# EAGLE board Yitran_IT900_Hutschiene_1_4 (EAGLE 6.1)
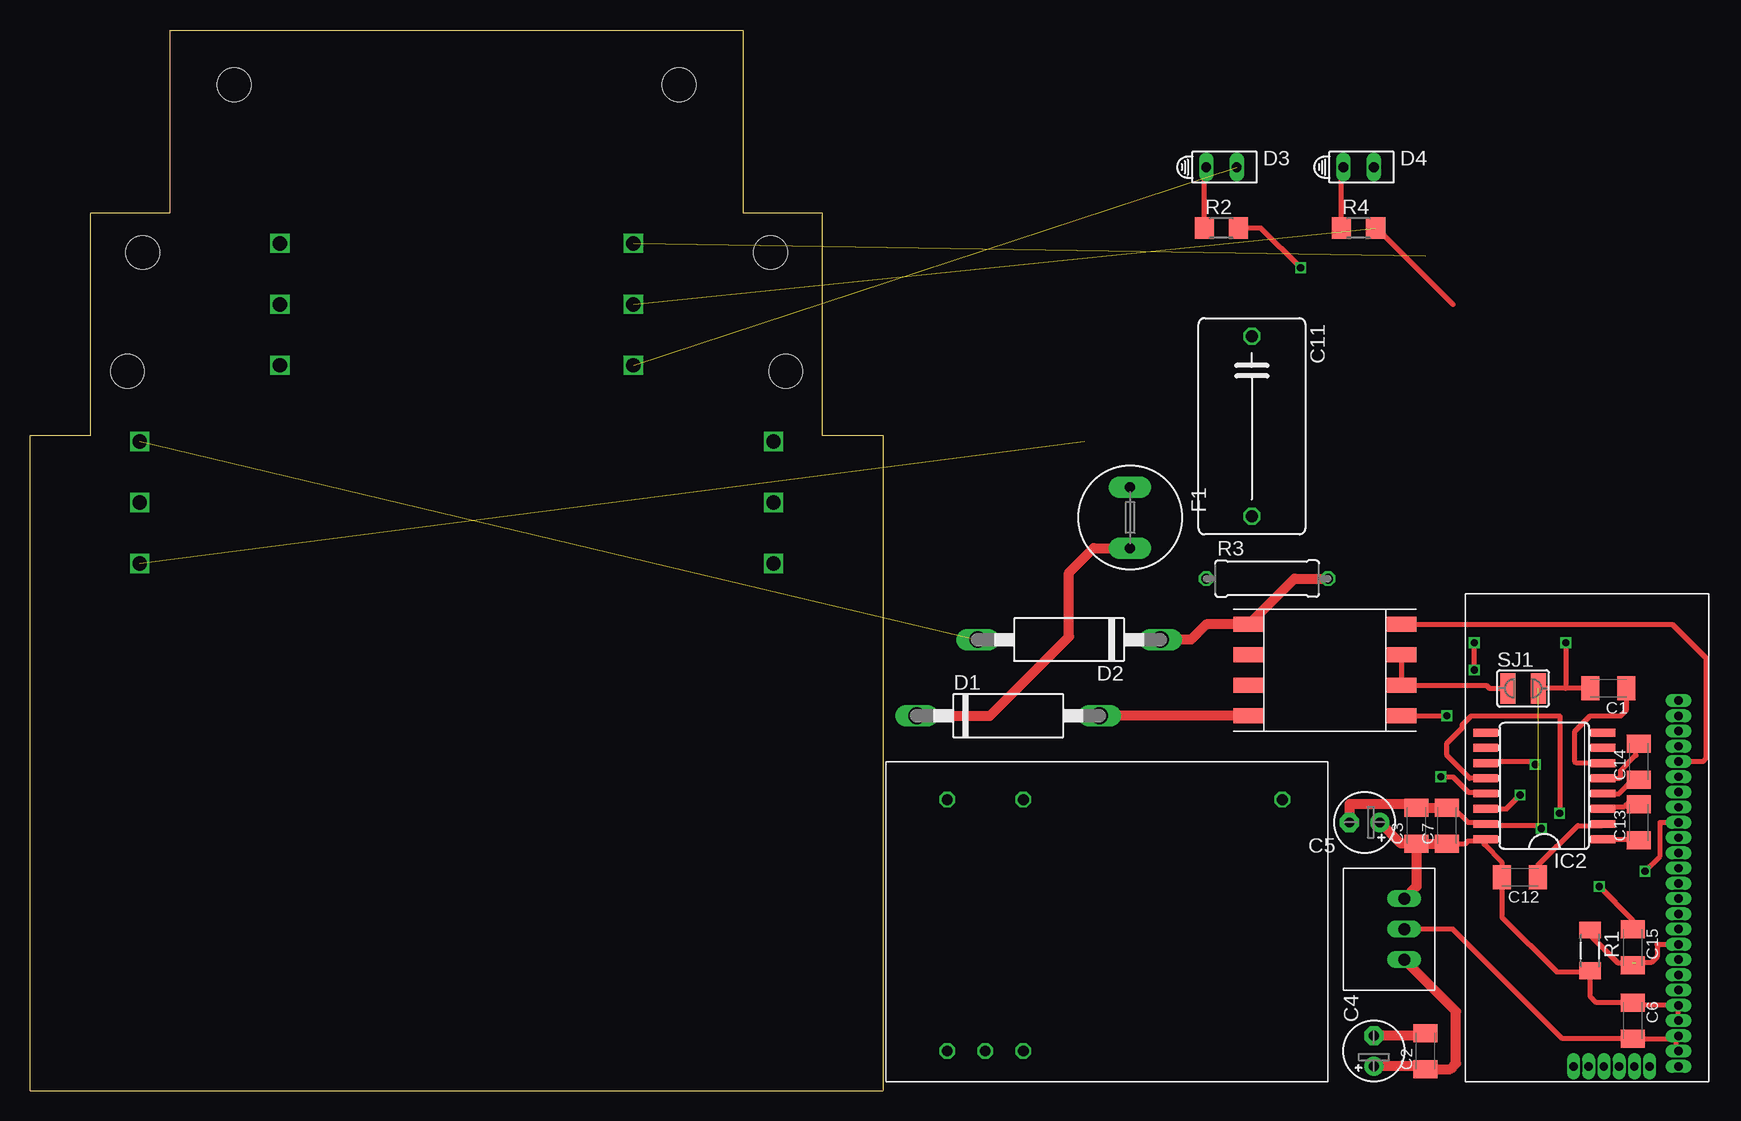
[diagram p0: board, top side]
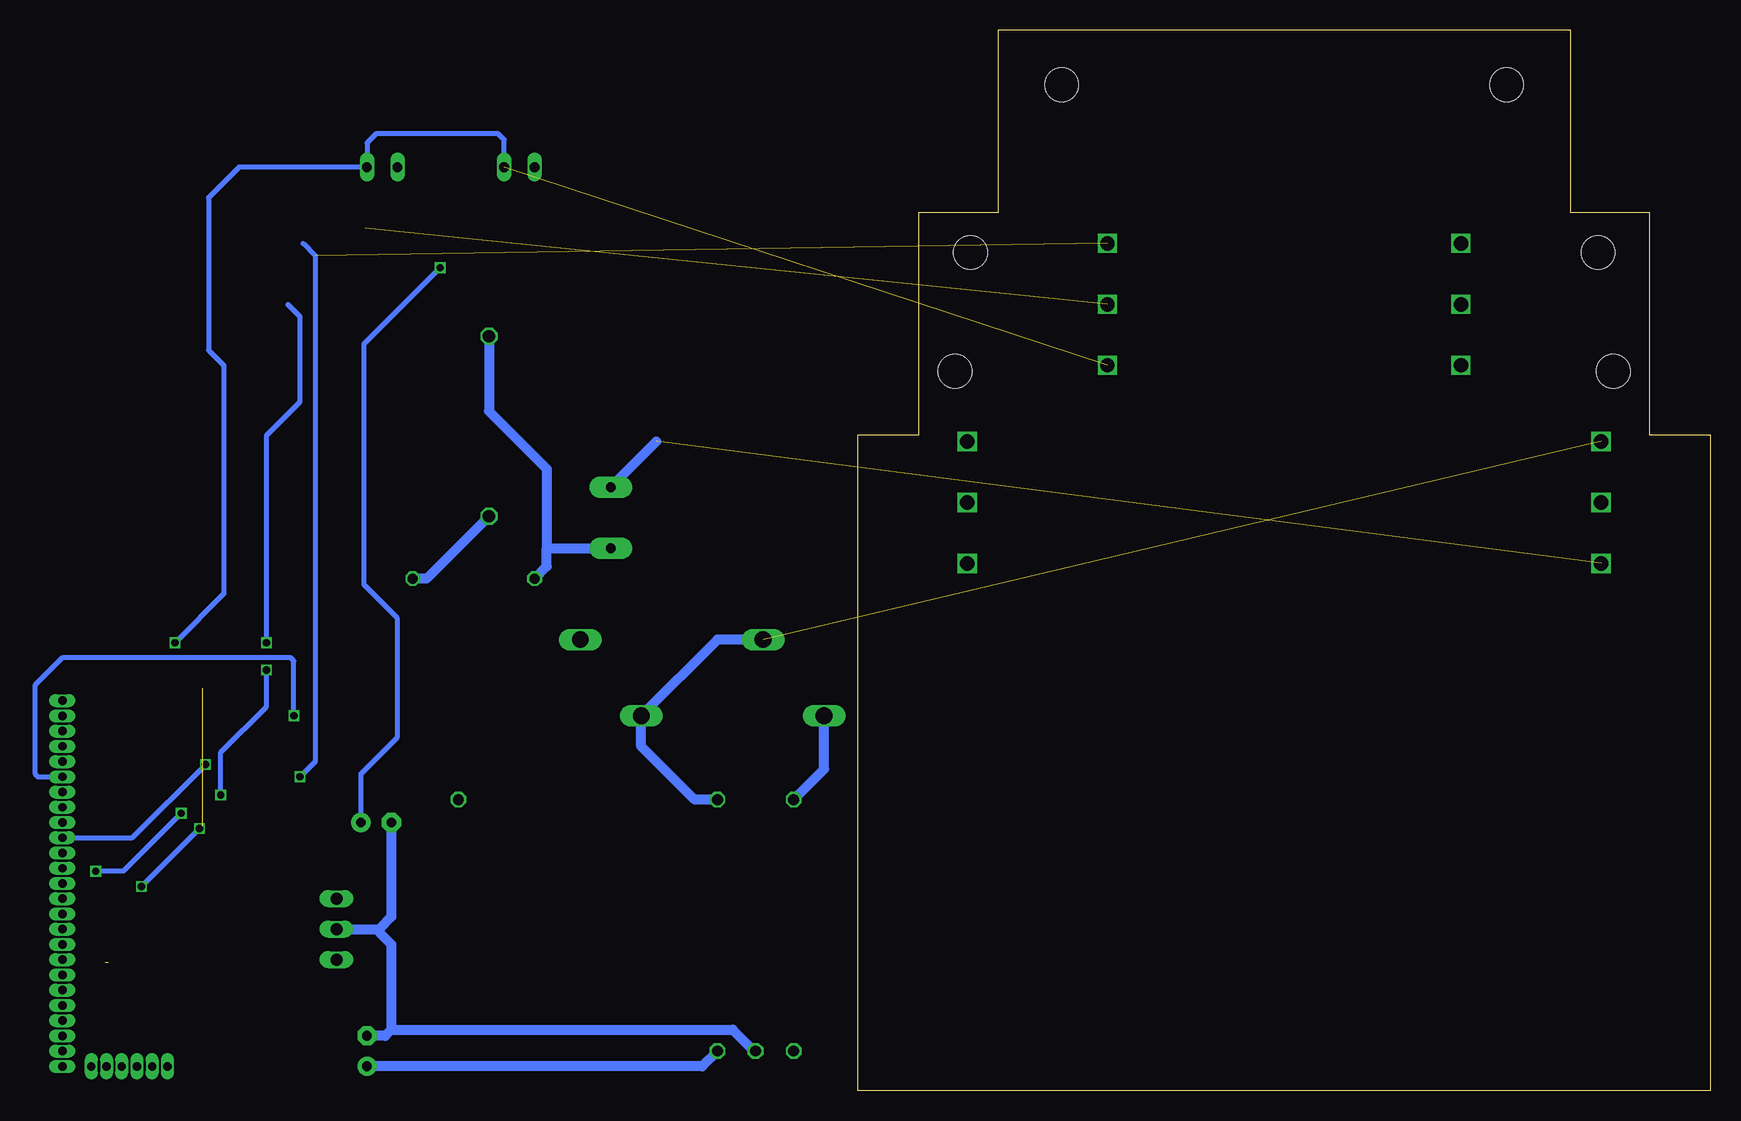
[diagram p1: board, bottom side, seen from below]

Size 71.12 x 88.39 mm. Coordinates in mm from the lower left corner, seen from the top.
Copper layers (1*16): Top 0.035mm / dielectric 1.5mm / Bottom 0.035mm
Design rules: minimum track width 0.15mm, minimum drill 0.3mm, track to track 0.15mm, track to pad 0.15mm, pad to pad 0.15mm, via to via 0.15mm, smd to smd 0.15mm, copper to edge 0.3mm, drill to drill 0.2mm, minimum pad ring 0.2mm, minimum via ring 0.15mm, stop-mask expansion 0.075mm, vias tented up to drill 0mil, thermal gap 0.2mm

## Footprints (pad centres in the part's own frame; a part is rotated, then mirrored left to right if it is on the bottom)
C1206K = smd 1.5 x 2: 1 -1.5,0; 2 1.5,0
E2,5-5 = drill 0.813 pad 1.6: + -1.27,0 | drill 0.813 pad 1.6 octagon: - 1.27,0
C150-091X182 = drill 1.016 octagon: 1 -7.493,0; 2 7.493,0
CB417-15 = drill 1.397 long: A 7.62,0; C -7.62,0
HLMP6 = drill 0.813 long: A -1.27,0; K 1.27,0
TR5 = drill 0.813 pad 1.778 long: 1 -2.54,0; 2 2.54,0
SO16L = smd 0.66 x 2.032: 1 -4.445,-4.902; 2 -3.175,-4.902; 3 -1.905,-4.902; 4 -0.635,-4.902; 5 0.635,-4.902; 6 1.905,-4.902; 7 3.175,-4.902; 8 4.445,-4.902; 9 4.445,4.902; 10 3.175,4.902; 11 1.905,4.902; 12 0.635,4.902; 13 -0.635,4.902; 14 -1.905,4.902; 15 -3.175,4.902; 16 -4.445,4.902
M1406 = smd 1.4 x 1.8: 1 -1.7,0; 2 1.7,0
R1206 = smd 1.6 x 1.803: 1 -1.422,0; 2 1.422,0
0309/10 = drill 0.813 octagon: 1 -5.08,0; 2 5.08,0
SJW = smd 1.27 x 2.54: 1 -1.27,0; 2 1.27,0
RECOM785X = drill 1 long: GND 0,2.54; VIN -2.54,2.54; VOUT 2.54,2.54
LDG-A-12 = drill 1.2 square: P$1 -26.416,-44.45; P$2 -26.416,-39.37; P$3 -26.416,-34.29; P$4 -14.732,-27.94; P$5 -14.732,-22.86; P$6 -14.732,-17.78; P$7 26.416,-44.45; P$8 26.416,-39.37; P$9 26.416,-34.29; P$10 14.732,-27.94; P$11 14.732,-22.86; P$12 14.732,-17.78 | hole 2.8: -18.542,-4.572; 18.542,-4.572; 26.162,-18.542; -26.162,-18.542; -27.432,-28.448; 27.432,-28.448
MODEM_FUSS = drill 0.7 pad 0.813 long: P$1 -20.32,-8.89; P$2 -19.05,-8.89; P$3 -17.78,-8.89; P$4 -16.51,-8.89; P$5 -15.24,-8.89; P$6 -13.97,-8.89; P$7 -12.7,-8.89; P$8 -11.43,-8.89; P$9 -10.16,-8.89; P$10 -8.89,-8.89; P$11 -7.62,-8.89; P$12 -6.35,-8.89; P$13 -5.08,-8.89; P$14 -3.81,-8.89; P$15 -2.54,-8.89; P$16 -1.27,-8.89; P$17 0,-8.89; P$18 1.27,-8.89; P$19 2.54,-8.89; P$20 3.81,-8.89; P$21 5.08,-8.89; P$22 6.35,-8.89; P$23 7.62,-8.89; P$24 8.89,-8.89; P$25 10.16,-8.89; P$29 -20.32,-3.937; P$30 -20.32,-5.207; P$31 -20.32,-6.477 | drill 0.7 pad 0.61 long: P$26 -20.32,-0.127; P$27 -20.32,-1.397; P$28 -20.32,-2.667
RAC04_12SA = drill 0.9 octagon: +VO 25.4,24.13; GND 28.575,24.13; L 31.75,3.175; N 25.4,3.175; NC 3.81,3.175; NC1 31.75,24.13
PLC-UEBERTRAGER_V2 = smd 2.54 x 1.27: 1LINE1 6.35,3.81; 2 6.35,1.27; 3 6.35,-1.27; 4LINE2 6.35,-3.81; 6NC -6.35,1.27; 7NC -6.35,-1.27; 8N -6.35,-3.81; L5 -6.35,3.81

## Placement (x,y rotation side)
C1  100n  [C1206K]  131.57,33.53 180 top  (outside the outline)
C2  100n  [C1206K]  116.33,3.3 90 top  (outside the outline)
C3  100n  [C1206K]  115.57,22.1 90 top  (outside the outline)
C4  4µ7  [E2,5-5]  112.01,3.3 90 top  (outside the outline)
C5  4µ7  [E2,5-5]  111.25,22.35 180 top  (outside the outline)
C6  100n  [C1206K]  133.6,5.84 270 top  (outside the outline)
C7  100n  [C1206K]  118.11,22.1 90 top  (outside the outline)
C11  470n  [C150-091X182]  101.85,55.37 270 top  (outside the outline)
C12  100n  [C1206K]  124.21,17.78 180 top  (outside the outline)
C13  100n  [C1206K]  134.11,22.35 90 top  (outside the outline)
C14  100n  [C1206K]  134.11,27.43 90 top  (outside the outline)
C15  100n  [C1206K]  133.6,11.94 270 top  (outside the outline)
D1  P6KE418C  [CB417-15]  81.53,31.24 0 top
D2  P6KE6V8C  [CB417-15]  86.61,37.59 180 top  (outside the outline)
D3  Power_3,3V rot  [HLMP6]  99.31,76.96 0 top  (outside the outline)
D4  TxD gruen  [HLMP6]  110.74,76.96 0 top  (outside the outline)
F1  1A  [TR5]  91.69,47.75 270 top  (outside the outline)
IC2  MAX3232CWE  [SO16L]  126.24,25.4 90 top  (outside the outline)
R1  100k  [M1406]  130.05,11.68 270 top  (outside the outline)
R2  330R  [R1206]  99.31,71.88 0 top  (outside the outline)
R3  470k  [0309/10]  103.12,42.67 0 top  (outside the outline)
R4  330R  [R1206]  110.74,71.88 0 top  (outside the outline)
SJ1  [SJW]  124.46,33.53 0 top  (outside the outline)
U$1  RECOM_783_3  [RECOM785X]  117.09,13.46 90 top  (outside the outline)
U$2  LDG-A-12  [LDG-A-12]  35.56,88.39 0 top
U$3  MODEMSTECKER  [MODEM_FUSS]  128.52,22.35 90 top  (outside the outline)
U$9  RECOM_RAC04_12SA  [RAC04_12SA]  108.2,27.43 180 top  (outside the outline)
U$10  PLC_UEBERTRAGER_V2  [PLC-UEBERTRAGER_V2]  107.95,35.05 0 top  (outside the outline)

## Library data of the parts
C1-C7 C11-C15 R1-R4 = resistor
D1 D2 = diode
D3 D4 = display-hp; MF: AGILENT TECHNOLOGIES; MPN: HLMP-6500; OC_FARNELL: 1652490; OC_NEWARK: 40K0088
F1 = fuse; OC_FARNELL: unknown; OC_NEWARK: unknown
IC2 = maxim; MF: MAXIM; MPN: MAX3232CWE+; OC_FARNELL: 9725504; OC_NEWARK: 68K4630
SJ1 = jumper
U$1 U$3 U$9 U$10 = ADS
U$2 = Erni_LDG_A_12_Leiterplatte

## Nets
3V3: C3.1 C5.+ C6.1 C7.1 C12.2 IC2.16 R1.2 R2.2 U$1.VOUT U$3.P$4 U$3.P$5
GND: C1.2 C2.2 C3.2 C4.- C5.- C6.2 C7.2 C15.1 D3.K D4.K IC2.15 SJ1.2 U$1.GND U$2.P$10 U$3.P$2 U$3.P$3 U$9.GND
L: C11.1 D1.C F1.2 R3.1 U$9.L
N: D1.A D2.A U$2.P$3 U$9.N U$10.8N
N$1: F1.1 U$2.P$1
N$2: C11.2 D2.C R3.2 U$10.L5
N$3: C2.1 C4.+ U$1.VIN U$9.+VO
N$4: D3.A R2.1
N$5: U$3.P$21 U$10.1LINE1
N$6: U$3.P$20 U$10.4LINE2
N$7: C13.1 IC2.1
N$8: C13.2 IC2.3
N$9: C14.1 IC2.4
N$10: C14.2 IC2.5
N$11: C12.1 IC2.2
N$12: C1.1 IC2.6
N$13: D4.A R4.1
N$14: SJ1.1 U$10.2 U$10.3
N$16: IC2.11 U$3.P$16
N$18: IC2.12 U$3.P$17
N$19: C15.2 R1.1 U$3.P$9
RXD: IC2.13 U$2.P$12
TXD: IC2.14 R4.2 U$2.P$11

## Tracks (layer width: path | path; a pad name or v marks a point on that pad's centre or on a via)
3V3  (via drill 0.6)
  Top 0.406: v105.92,68.58 102.62,71.88 R2.2 | U$3.P$4 U$3.P$5 133.83,7.11 C6.1 130.58,7.34 130.05,7.87 130.05,9.91 | 130.05,9.91 R1.2 | 130.05,9.91 127.25,9.91 122.71,14.45 C12.2 122.68,17.8 122.68,19.05 121.21,20.52 121.21,20.83 | C7.1 119.66,20.6 119.89,20.83 121.21,20.83 | 121.21,20.83 IC2.16
  Top 0.813: C3.1 115.57,17.02 U$1.VOUT | C3.1 114.28,20.6 C5.+ | C3.1 C7.1
  Bottom 0.406: C5.+ 112.52,26.42 109.47,29.46 109.47,39.37 112.27,42.16 112.27,62.23 v105.92,68.58
GND  (via drill 0.6)  (2 unrouted)
  Top 0.406: 137.18,4.34 C6.2 127.74,4.34 118.62,13.46 U$1.GND | 137.18,4.34 U$3.P$3 | 137.18,4.34 137.18,3.53 U$3.P$2 | C7.2 118.64,23.6 119.89,22.35 121.21,22.35 IC2.15 121.46,22.1 125.73,22.1 v125.98,21.84 | C1.2 128.02,33.53 | 128.02,33.53 SJ1.2 | v128.02,37.34 128.02,33.53 | C15.1 133.6,14.22 v130.81,17.02
  Top 0.813: C2.2 116.1,4.57 C4.- | C5.- 109.98,23.88 115.57,23.88 C3.2 C7.2
  Bottom 0.406: D3.K 100.58,79.25 101.09,79.76 111.25,79.76 112.01,78.99 D4.K 122.68,76.96 125.22,74.42 125.22,61.72 123.95,60.45 123.95,41.4 v128.02,37.34 | v130.81,17.02 v125.98,21.84
  Bottom 0.813: U$1.GND 111,13.46 | C5.- 109.98,14.48 111,13.46 | 111,13.46 111,13.21 109.98,12.19 109.98,5.08 | 109.98,5.08 110.49,4.57 C4.- | 109.98,5.08 81.53,5.08 79.76,3.3 U$9.GND
L
  Top 0.813: D1.C 80.01,31.24 86.61,37.85 86.61,43.18 88.65,45.21 F1.2
  Bottom 0.813: U$9.L 73.91,26.8 D1.C | C11.1 101.85,56.64 97.03,51.82 97.03,45.21 | 97.03,45.21 F1.2 | R3.1 97.03,43.69 97.03,45.21
N  (1 unrouted)
  Top 0.813: U$10.8N D1.A
  Bottom 0.813: 79.25,37.85 D2.A 82.8,37.59 D1.A 89.15,28.7 84.71,24.26 U$9.N
N$1  (1 unrouted)
  Bottom 0.813: 87.88,54.1 F1.1
N$2
  Top 0.813: R3.2 105.41,42.67 U$10.L5 98.04,38.86 96.77,37.59 D2.C
  Bottom 0.813: C11.2 107.06,42.67 R3.2
N$3
  Top 0.813: C4.+ 116.1,2.03 C2.1 118.39,1.8 118.87,2.29 118.87,6.6 U$1.VIN
  Bottom 0.813: U$9.+VO 84.07,2.03 C4.+
N$4
  Top 0.406: R2.1 97.89,76.81 D3.A
N$5
  Top 0.406: U$10.1LINE1 136.91,38.86 139.7,36.07 139.7,27.69 139.45,27.43 U$3.P$21
N$6  (via drill 0.6)
  Top 0.406: U$10.4LINE2 v118.11,31.24
  Bottom 0.406: v118.11,31.24 118.11,35.81 118.36,36.07 137.41,36.07 139.7,33.78 139.7,26.42 139.45,26.16 U$3.P$20
N$7
  Top 0.406: IC2.1 134.01,20.95 C13.1
N$8
  Top 0.406: C13.2 133.07,23.85 132.84,23.62 131.27,23.62 IC2.3
N$9
  Top 0.406: IC2.4 132.46,24.76 133.6,25.91 134.09,25.91 C14.1
N$10
  Top 0.406: IC2.5 132.46,26.03 132.59,26.16 132.59,26.67 133.86,27.94 133.86,28.68 C14.2
N$11
  Top 0.406: C12.1 125.71,18.77 129.03,22.1 131.01,22.1 IC2.2
N$12
  Top 0.406: IC2.6 128.91,27.3 128.78,27.43 128.78,29.97 130.05,31.24 132.59,31.24 133.1,31.75 133.1,33.5 C1.1
N$13
  Top 0.406: R4.1 109.32,76.81 D4.A
N$14
  Top 0.406: U$10.2 U$10.3 121.41,33.78 121.67,33.53 SJ1.1
N$16  (via drill 0.6)
  Top 0.406: v125.48,27.18 125.22,27.43 121.46,27.43 IC2.11
  Bottom 0.406: U$3.P$16 131.57,21.08 v125.48,27.18
N$18  (via drill 0.6)
  Top 0.406: IC2.12 120.02,26.03 118.11,27.94 118.11,28.96 119.38,30.23 119.38,30.48 120.14,31.24 127.51,31.24 v127.51,23.11 | v134.62,18.29 135.89,19.56 135.89,22.35 U$3.P$17
  Bottom 0.406: v127.51,23.11 132.33,18.29 v134.62,18.29
N$19  (1 unrouted)
  Top 0.406: U$3.P$9 135.64,12.19 135.64,11.18 135.13,10.67 133.83,10.67 C15.2 | R1.1 130.05,12.95 132.33,10.67 133.6,10.67
RXD  (via drill 0.6)  (1 unrouted)
  Top 0.406: v117.6,26.16 118.62,26.16 119.89,24.89 121.21,24.89 IC2.13
  Bottom 0.406: 117.35,70.61 116.33,69.6 116.33,27.43 v117.6,26.16
TXD  (via drill 0.6)  (2 unrouted)
  Top 0.406: R4.2 112.27,71.88 118.62,65.53 | IC2.14 123.06,23.49 v124.21,24.64 | v120.4,35.05 v120.4,37.34
  Bottom 0.406: v124.21,24.64 124.21,28.19 120.4,32 v120.4,35.05 | v120.4,37.34 120.4,54.61 117.6,57.4 117.6,64.52 118.62,65.53